# Allegro board pc049a_lemo_db_03.brd
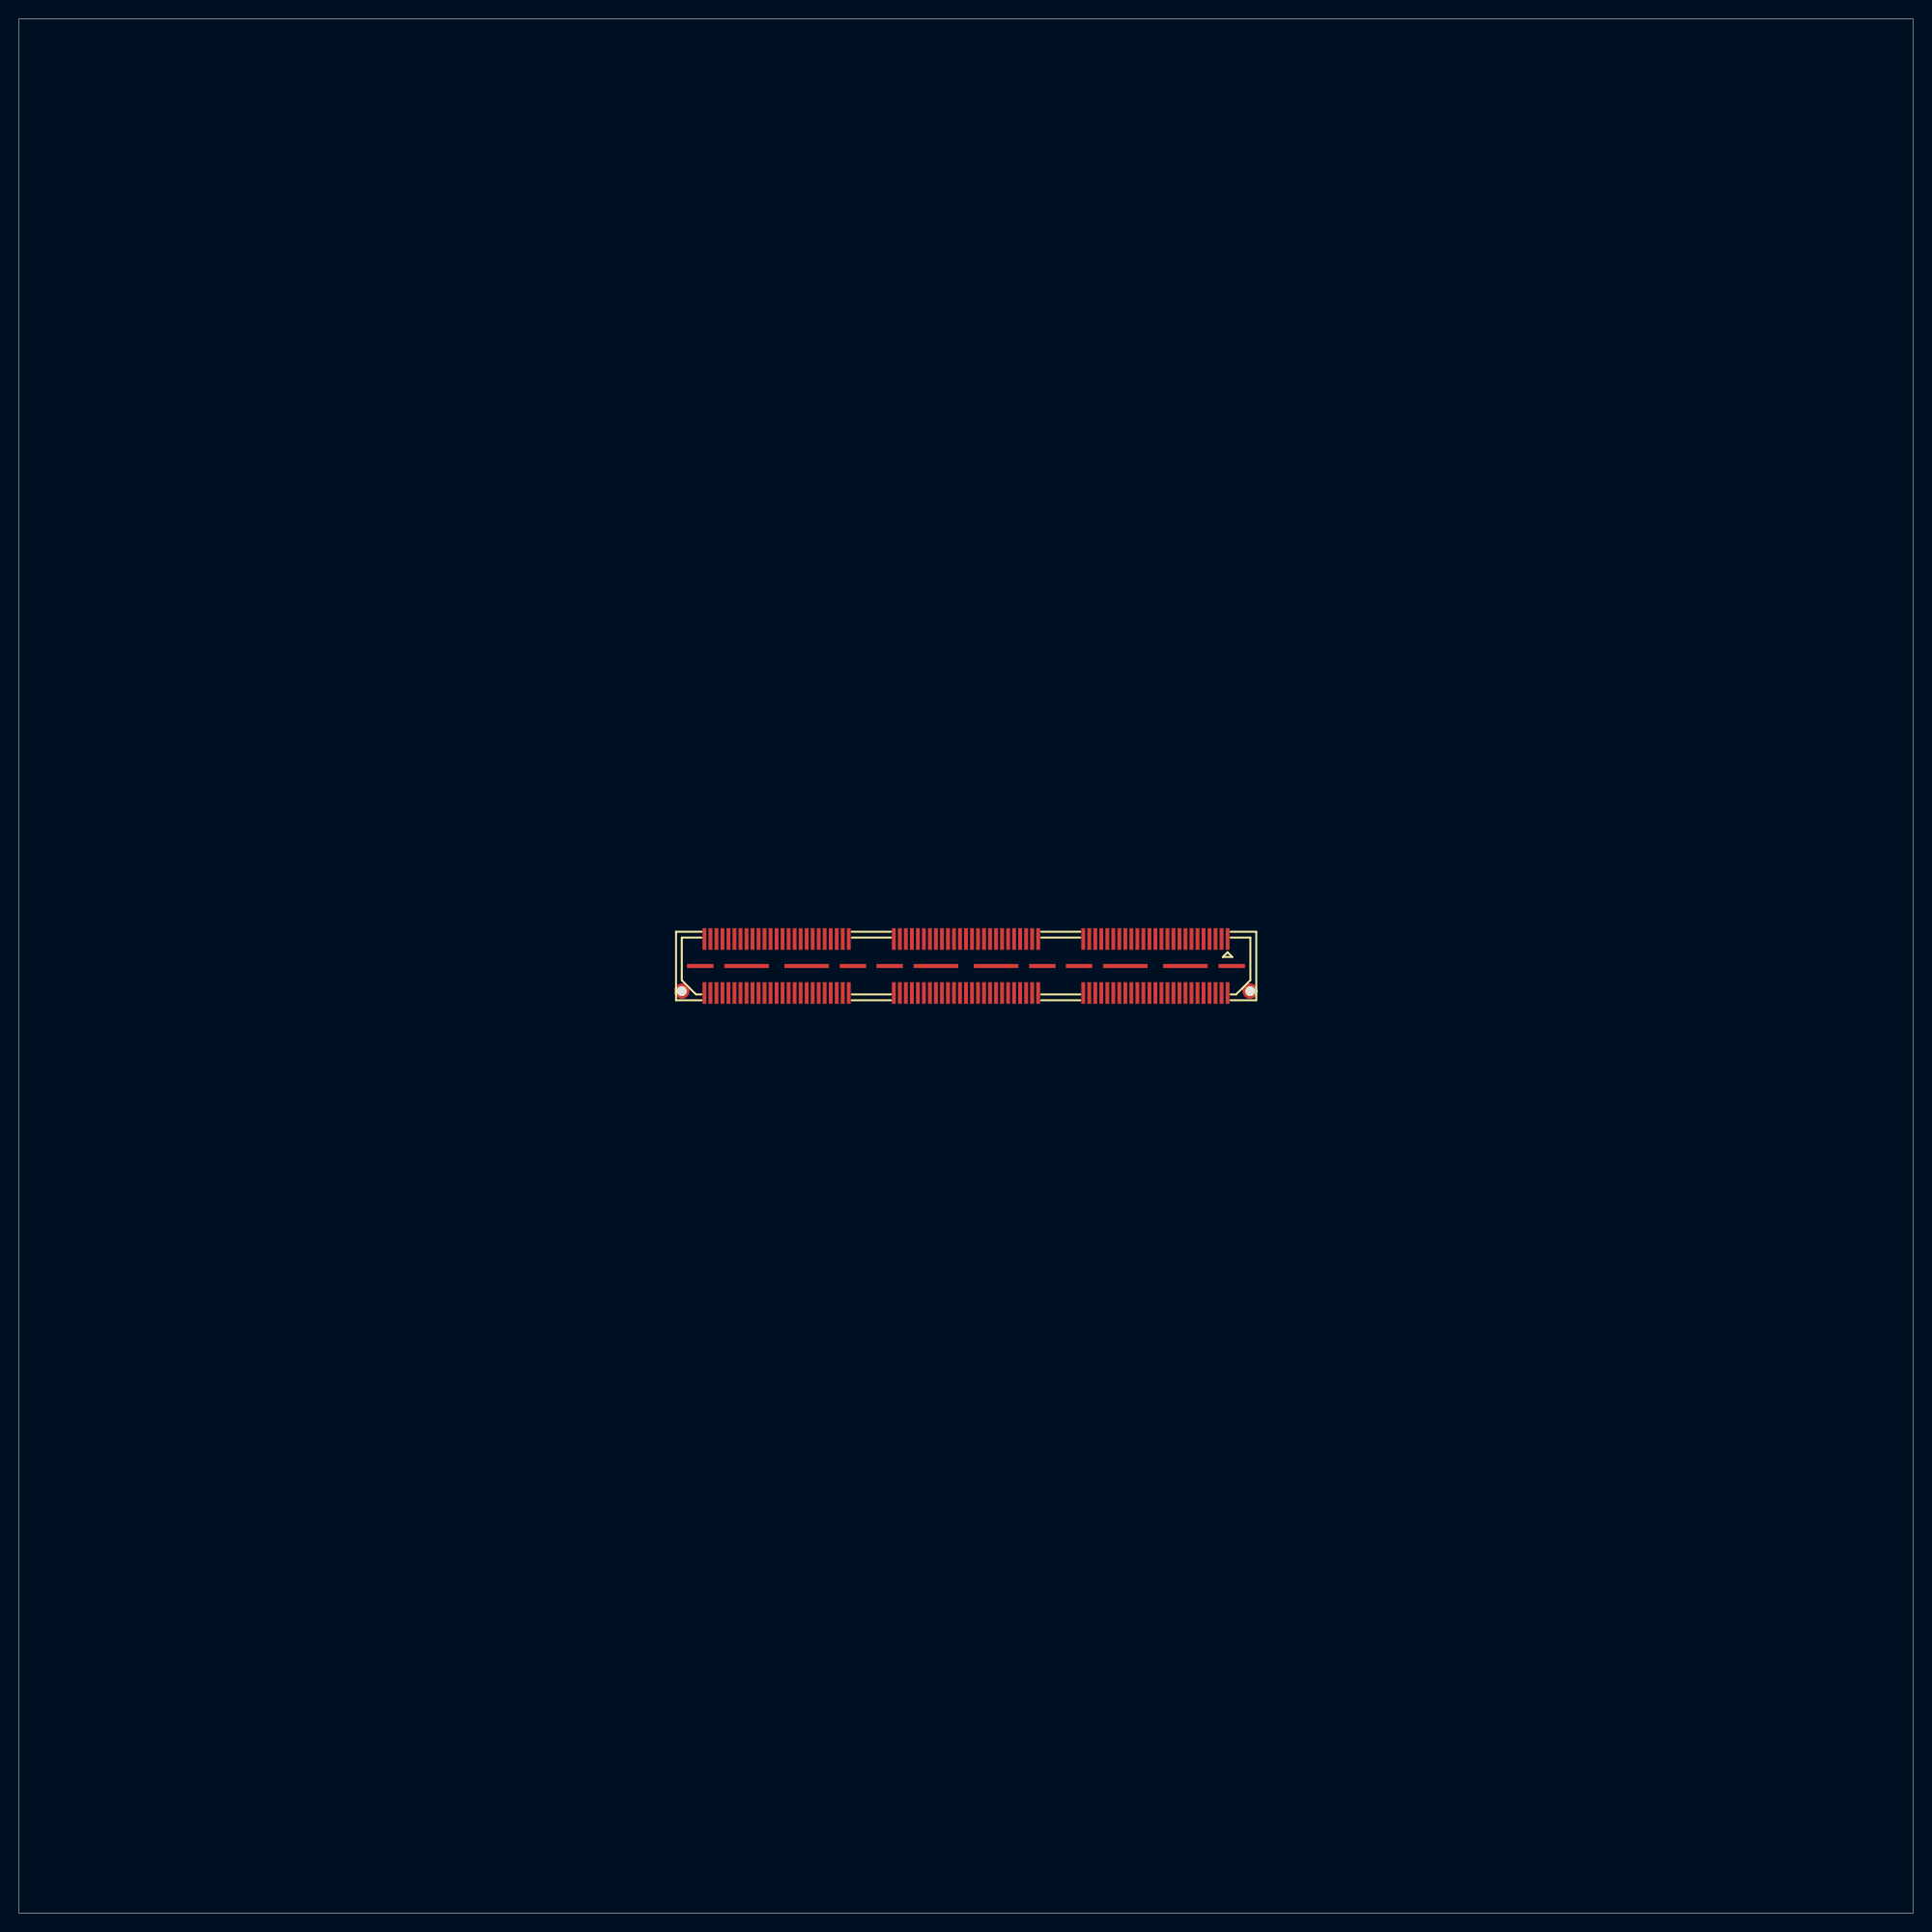
[diagram p0: board, top side]
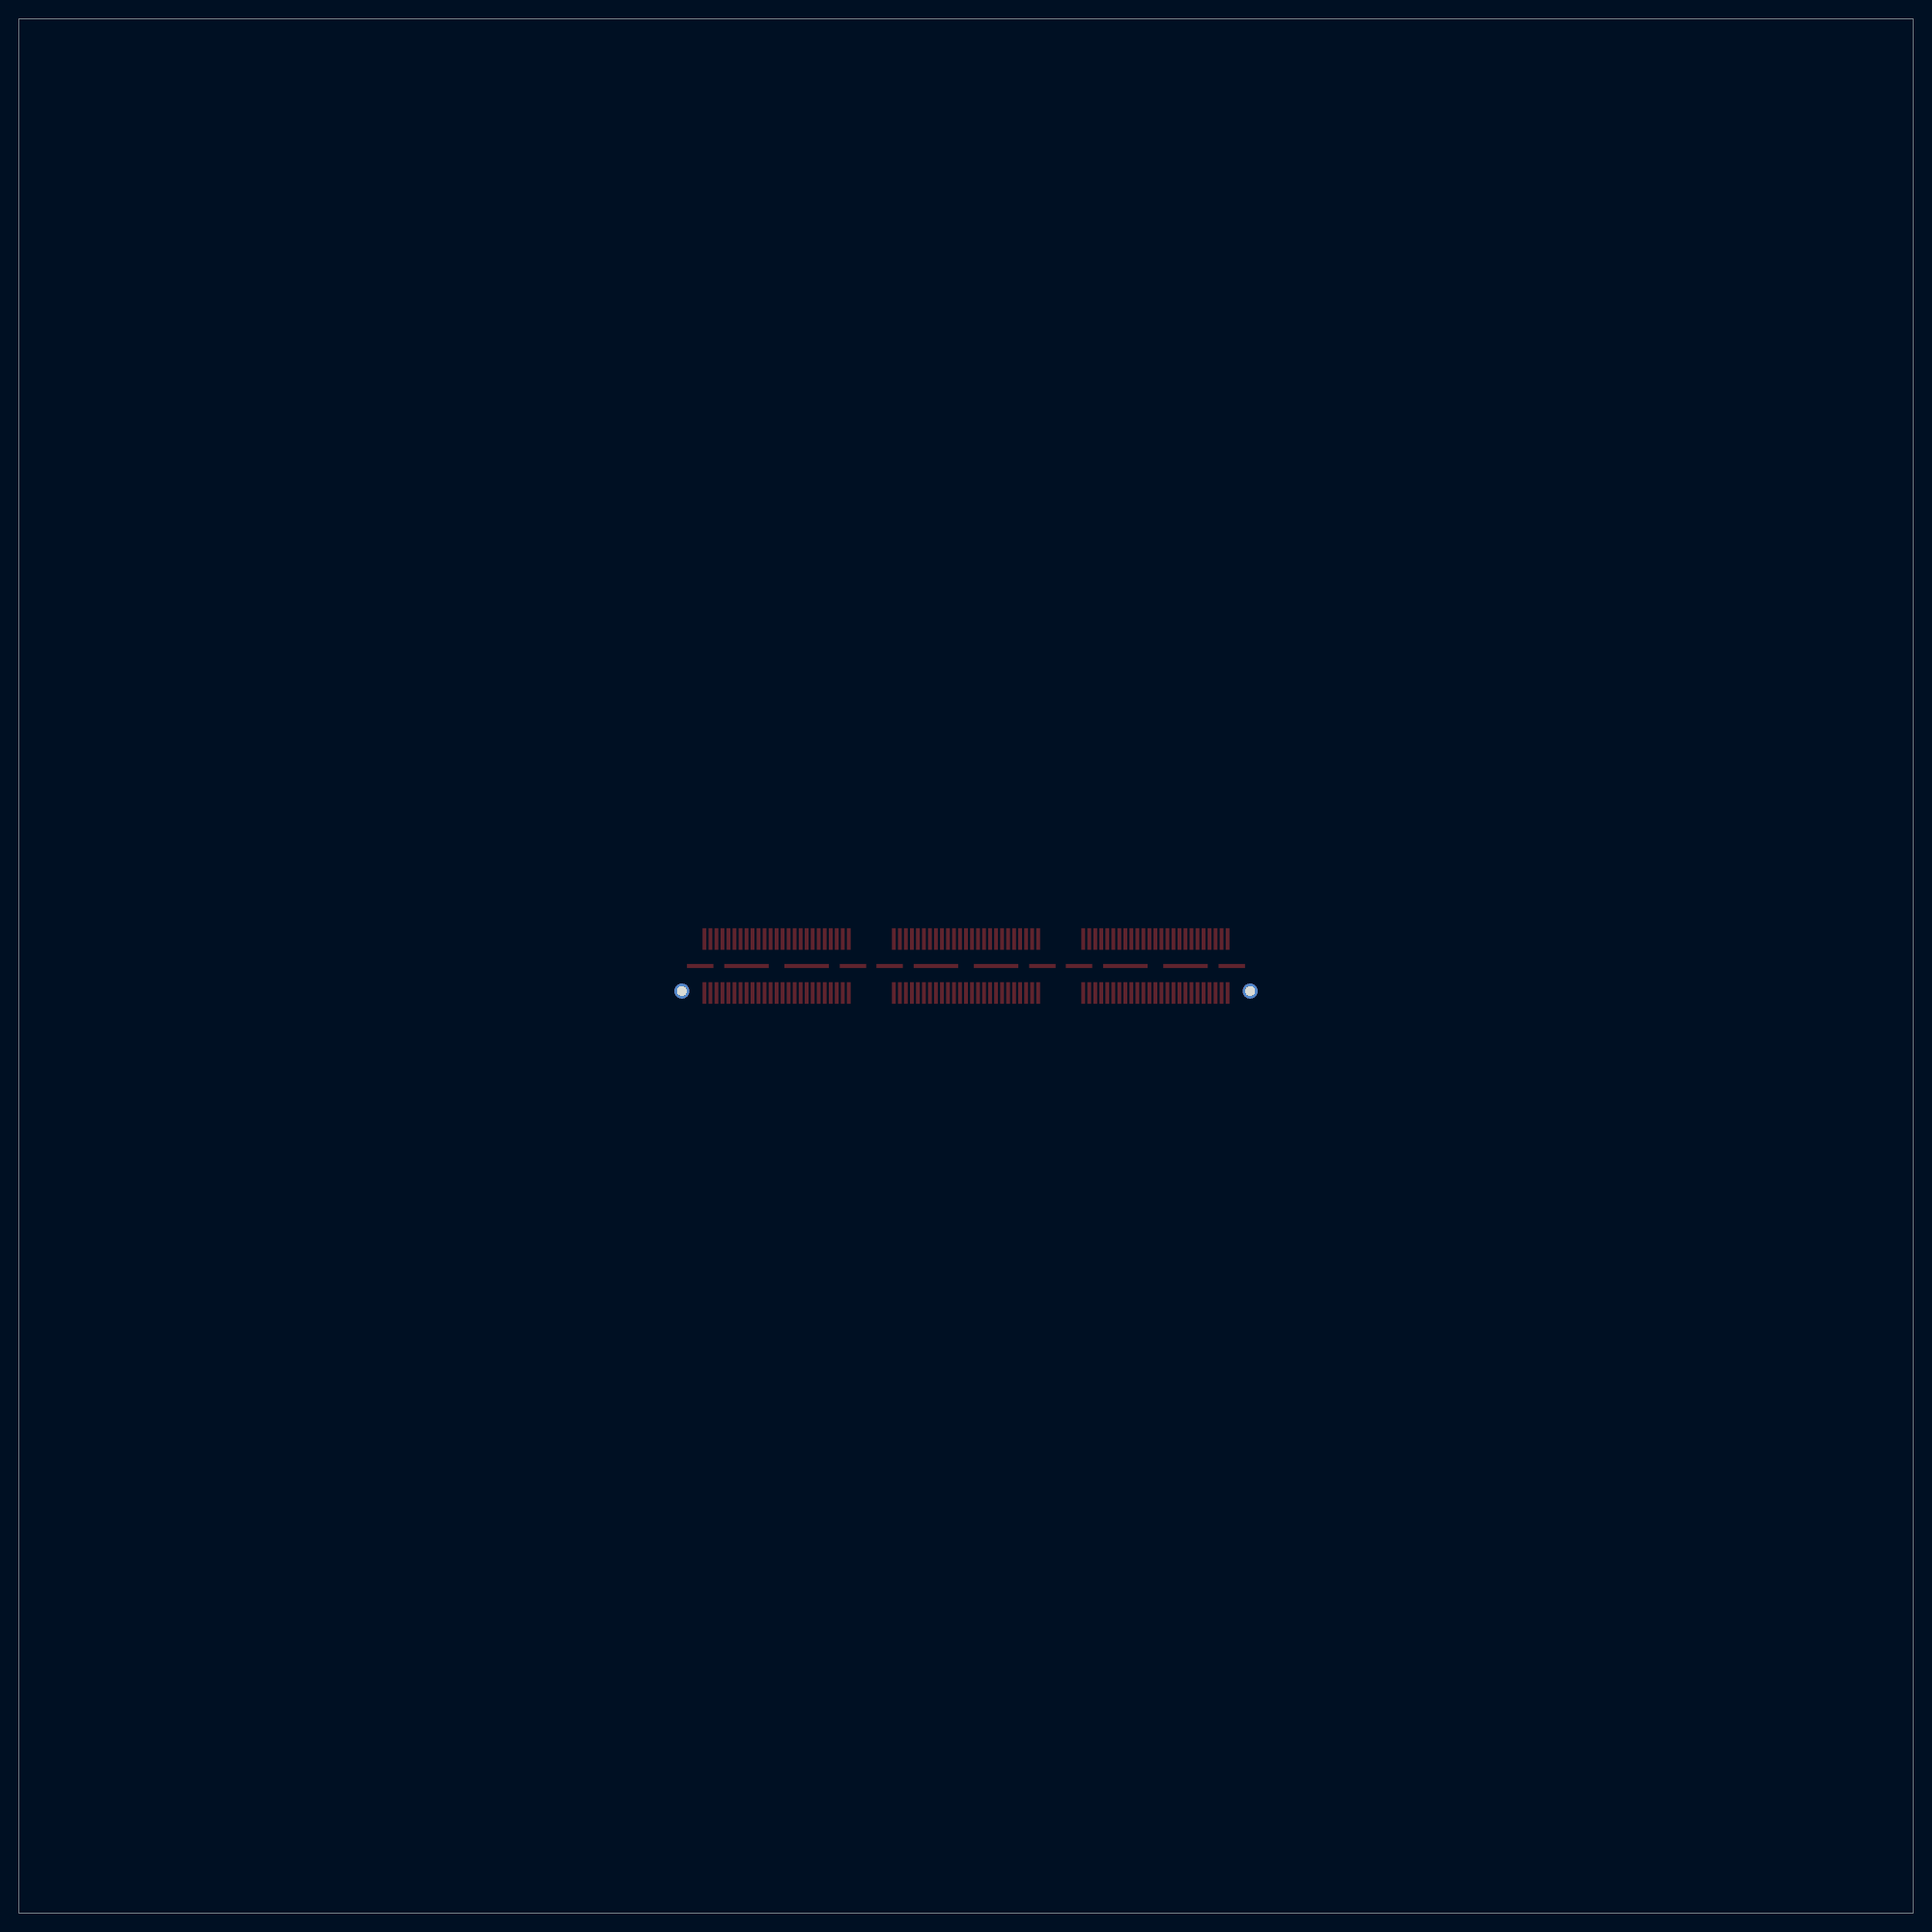
[diagram p1: board, bottom side, seen from below]

Outline 200 x 200 mm; copper layers: TOP, L2, L3, L4, L5, BOTTOM. Coordinates in mm from the lower left corner of the outline.
Outline path: 0,200 200,200 200,0 0,0 0,200

## Design rules (mm)
net group ANALOG_TO_MAROC: nets ANALOG_TO_MAROC<0> ANALOG_TO_MAROC<1> ANALOG_TO_MAROC<2> ANALOG_TO_MAROC<3> ANALOG_TO_MAROC<4> ANALOG_TO_MAROC<5> ANALOG_TO_MAROC<6> ANALOG_TO_MAROC<7> ANALOG_TO_MAROC<8> ANALOG_TO_MAROC<9> ANALOG_TO_MAROC<10> ANALOG_TO_MAROC<11> ANALOG_TO_MAROC<12> ANALOG_TO_MAROC<13> ANALOG_TO_MAROC<14> ANALOG_TO_MAROC<15> ANALOG_TO_MAROC<16> ANALOG_TO_MAROC<17> ANALOG_TO_MAROC<18> ANALOG_TO_MAROC<19> ANALOG_TO_MAROC<20> ANALOG_TO_MAROC<21> ANALOG_TO_MAROC<22> ANALOG_TO_MAROC<23> ANALOG_TO_MAROC<24> ANALOG_TO_MAROC<25> ANALOG_TO_MAROC<26> ANALOG_TO_MAROC<27> ANALOG_TO_MAROC<28> ANALOG_TO_MAROC<29> ANALOG_TO_MAROC<30> ANALOG_TO_MAROC<31> ANALOG_TO_MAROC<32> ANALOG_TO_MAROC<33> ANALOG_TO_MAROC<34> ANALOG_TO_MAROC<35> ANALOG_TO_MAROC<36> ANALOG_TO_MAROC<37> ANALOG_TO_MAROC<38> ANALOG_TO_MAROC<39> ANALOG_TO_MAROC<40> ANALOG_TO_MAROC<41> ANALOG_TO_MAROC<42> ANALOG_TO_MAROC<43> ANALOG_TO_MAROC<44> ANALOG_TO_MAROC<45> ANALOG_TO_MAROC<46> ANALOG_TO_MAROC<47> ANALOG_TO_MAROC<48> ANALOG_TO_MAROC<49> ANALOG_TO_MAROC<50> ANALOG_TO_MAROC<51> ANALOG_TO_MAROC<52> ANALOG_TO_MAROC<53> ANALOG_TO_MAROC<54> ANALOG_TO_MAROC<55> ANALOG_TO_MAROC<56> ANALOG_TO_MAROC<57> ANALOG_TO_MAROC<58> ANALOG_TO_MAROC<59> ANALOG_TO_MAROC<60> ANALOG_TO_MAROC<61> ANALOG_TO_MAROC<62> ANALOG_TO_MAROC<63>

## Placement (name value [footprint] x y rotation side)
J1  -  [CON150_QSSDA]  127.62 102.85 270 top

## Library data of the parts
J1 = CON150P: part number: CON150P-QSS75_01FDA

## Footprints (pads in the part's own frame, mm; a bottom-side part is the same pattern mirrored in y, then rotated)
CON150_QSSDA
  round 1.6 hole 1.016: (5.5,2.38) (5.5,-57.62)
  rect 2.286x0.406 smd: 1(0,0) 2(5.7,0) 3(0,-0.635) 4(5.7,-0.635) 5(0,-1.27) 6(5.7,-1.27) 7(0,-1.905) 8(5.7,-1.905) 9(0,-2.54) 10(5.7,-2.54) 11(0,-3.175) 12(5.7,-3.175) 13(0,-3.81) 14(5.7,-3.81) 15(0,-4.445) 16(5.7,-4.445) 17(0,-5.08) 18(5.7,-5.08) 19(0,-5.715) 20(5.7,-5.715) 21(0,-6.35) 22(5.7,-6.35) 23(0,-6.985) 24(5.7,-6.985) 25(0,-7.62) 26(5.7,-7.62) 27(0,-8.255) 28(5.7,-8.255) 29(0,-8.89) 30(5.7,-8.89) 31(0,-9.525) 32(5.7,-9.525) 33(0,-10.16) 34(5.7,-10.16) 35(0,-10.795) 36(5.7,-10.795) 37(0,-11.43) 38(5.7,-11.43) 39(0,-12.065) 40(5.7,-12.065) 41(0,-12.7) 42(5.7,-12.7) 43(0,-13.335) 44(5.7,-13.335) 45(0,-13.97) 46(5.7,-13.97) 47(0,-14.605) 48(5.7,-14.605) 49(0,-15.24) 50(5.7,-15.24) 51(0,-20) 52(5.7,-20) 53(0,-20.635) 54(5.7,-20.635) 55(0,-21.27) 56(5.7,-21.27) 57(0,-21.905) 58(5.7,-21.905) 59(0,-22.54) 60(5.7,-22.54) 61(0,-23.175) 62(5.7,-23.175) 63(0,-23.81) 64(5.7,-23.81) 65(0,-24.445) 66(5.7,-24.445) 67(0,-25.08) 68(5.7,-25.08) 69(0,-25.715) 70(5.7,-25.715) 71(0,-26.35) 72(5.7,-26.35) 73(0,-26.985) 74(5.7,-26.985) 75(0,-27.62) 76(5.7,-27.62) 77(0,-28.255) 78(5.7,-28.255) 79(0,-28.89) 80(5.7,-28.89) 81(0,-29.525) 82(5.7,-29.525) 83(0,-30.16) 84(5.7,-30.16) 85(0,-30.795) 86(5.7,-30.795) 87(0,-31.43) 88(5.7,-31.43) 89(0,-32.065) 90(5.7,-32.065) 91(0,-32.7) 92(5.7,-32.7) 93(0,-33.335) 94(5.7,-33.335) 95(0,-33.97) 96(5.7,-33.97) 97(0,-34.605) 98(5.7,-34.605) 99(0,-35.24) 100(5.7,-35.24) 101(0,-40) 102(5.7,-40) 103(0,-40.635) 104(5.7,-40.635) 105(0,-41.27) 106(5.7,-41.27) 107(0,-41.905) 108(5.7,-41.905) 109(0,-42.54) 110(5.7,-42.54) 111(0,-43.175) 112(5.7,-43.175) 113(0,-43.81) 114(5.7,-43.81) 115(0,-44.445) 116(5.7,-44.445) 117(0,-45.08) 118(5.7,-45.08) 119(0,-45.715) 120(5.7,-45.715) 121(0,-46.35) 122(5.7,-46.35) 123(0,-46.985) 124(5.7,-46.985) 125(0,-47.62) 126(5.7,-47.62) 127(0,-48.255) 128(5.7,-48.255) 129(0,-48.89) 130(5.7,-48.89) 131(0,-49.525) 132(5.7,-49.525) 133(0,-50.16) 134(5.7,-50.16) 135(0,-50.795) 136(5.7,-50.795) 137(0,-51.43) 138(5.7,-51.43) 139(0,-52.065) 140(5.7,-52.065) 141(0,-52.7) 142(5.7,-52.7) 143(0,-53.335) 144(5.7,-53.335) 145(0,-53.97) 146(5.7,-53.97) 147(0,-54.605) 148(5.7,-54.605) 149(0,-55.24) 150(5.7,-55.24)
  rect 0.432x2.794 smd: 151(2.85,0.445) 154(2.85,-15.685) 155(2.85,-19.555) 158(2.85,-35.685) 159(2.85,-39.555) 162(2.85,-55.685)
  rect 0.432x4.699 smd: 152(2.85,-4.445) 153(2.85,-10.795) 156(2.85,-24.445) 157(2.85,-30.795) 160(2.85,-44.445) 161(2.85,-50.795)

## Nets
AVDD: J1.147(A<146>) J1.148(A<147>) J1.149(A<148>) J1.150(A<149>)
GND_SIGNAL: J1.1(A<0>) J1.4(A<3>) J1.5(A<4>) J1.8(A<7>) J1.9(A<8>) J1.12(A<11>) J1.13(A<12>) J1.16(A<15>) J1.17(A<16>) J1.20(A<19>) J1.21(A<20>) J1.24(A<23>) J1.25(A<24>) J1.28(A<27>) J1.29(A<28>) J1.32(A<31>) J1.33(A<32>) J1.36(A<35>) J1.37(A<36>) J1.40(A<39>) J1.41(A<40>) J1.44(A<43>) J1.45(A<44>) J1.48(A<47>) J1.49(A<48>) J1.52(A<51>) J1.53(A<52>) J1.56(A<55>) J1.57(A<56>) J1.60(A<59>) J1.61(A<60>) J1.64(A<63>) J1.65(A<64>) J1.68(A<67>) J1.69(A<68>) J1.72(A<71>) J1.73(A<72>) J1.76(A<75>) J1.77(A<76>) J1.80(A<79>) J1.81(A<80>) J1.84(A<83>) J1.85(A<84>) J1.88(A<87>) J1.89(A<88>) J1.92(A<91>) J1.93(A<92>) J1.96(A<95>) J1.97(A<96>) J1.100(A<99>) J1.101(A<100>) J1.104(A<103>) J1.105(A<104>) J1.108(A<107>) J1.109(A<108>) J1.112(A<111>) J1.113(A<112>) J1.116(A<115>) J1.117(A<116>) J1.120(A<119>) J1.121(A<120>) J1.124(A<123>) J1.125(A<124>) J1.128(A<127>) J1.129(A<128>) J1.132(A<131>) J1.133(A<132>) J1.136(A<135>) J1.137(A<136>) J1.140(A<139>) J1.141(A<140>) J1.144(A<143>) J1.145(A<144>) J1.146(A<145>)
ANALOG_TO_MAROC<0>: J1.2(A<1>)
ANALOG_TO_MAROC<1>: J1.3(A<2>)
ANALOG_TO_MAROC<2>: J1.6(A<5>)
ANALOG_TO_MAROC<3>: J1.7(A<6>)
ANALOG_TO_MAROC<4>: J1.10(A<9>)
ANALOG_TO_MAROC<5>: J1.11(A<10>)
ANALOG_TO_MAROC<6>: J1.14(A<13>)
ANALOG_TO_MAROC<7>: J1.15(A<14>)
ANALOG_TO_MAROC<8>: J1.18(A<17>)
ANALOG_TO_MAROC<9>: J1.19(A<18>)
ANALOG_TO_MAROC<10>: J1.22(A<21>)
ANALOG_TO_MAROC<11>: J1.23(A<22>)
ANALOG_TO_MAROC<12>: J1.26(A<25>)
ANALOG_TO_MAROC<13>: J1.27(A<26>)
ANALOG_TO_MAROC<14>: J1.30(A<29>)
ANALOG_TO_MAROC<15>: J1.31(A<30>)
ANALOG_TO_MAROC<16>: J1.34(A<33>)
ANALOG_TO_MAROC<17>: J1.35(A<34>)
ANALOG_TO_MAROC<18>: J1.38(A<37>)
ANALOG_TO_MAROC<19>: J1.39(A<38>)
ANALOG_TO_MAROC<20>: J1.42(A<41>)
ANALOG_TO_MAROC<21>: J1.43(A<42>)
ANALOG_TO_MAROC<22>: J1.46(A<45>)
ANALOG_TO_MAROC<23>: J1.47(A<46>)
ANALOG_TO_MAROC<24>: J1.50(A<49>)
ANALOG_TO_MAROC<25>: J1.51(A<50>)
ANALOG_TO_MAROC<26>: J1.54(A<53>)
ANALOG_TO_MAROC<27>: J1.55(A<54>)
ANALOG_TO_MAROC<28>: J1.58(A<57>)
ANALOG_TO_MAROC<29>: J1.59(A<58>)
ANALOG_TO_MAROC<30>: J1.62(A<61>)
ANALOG_TO_MAROC<31>: J1.63(A<62>)
ANALOG_TO_MAROC<32>: J1.66(A<65>)
ANALOG_TO_MAROC<33>: J1.67(A<66>)
ANALOG_TO_MAROC<34>: J1.70(A<69>)
ANALOG_TO_MAROC<35>: J1.71(A<70>)
ANALOG_TO_MAROC<36>: J1.74(A<73>)
ANALOG_TO_MAROC<37>: J1.75(A<74>)
ANALOG_TO_MAROC<38>: J1.78(A<77>)
ANALOG_TO_MAROC<39>: J1.79(A<78>)
ANALOG_TO_MAROC<40>: J1.82(A<81>)
ANALOG_TO_MAROC<41>: J1.83(A<82>)
ANALOG_TO_MAROC<42>: J1.86(A<85>)
ANALOG_TO_MAROC<43>: J1.87(A<86>)
ANALOG_TO_MAROC<44>: J1.90(A<89>)
ANALOG_TO_MAROC<45>: J1.91(A<90>)
ANALOG_TO_MAROC<46>: J1.94(A<93>)
ANALOG_TO_MAROC<47>: J1.95(A<94>)
ANALOG_TO_MAROC<48>: J1.98(A<97>)
ANALOG_TO_MAROC<49>: J1.99(A<98>)
ANALOG_TO_MAROC<50>: J1.102(A<101>)
ANALOG_TO_MAROC<51>: J1.103(A<102>)
ANALOG_TO_MAROC<52>: J1.106(A<105>)
ANALOG_TO_MAROC<53>: J1.107(A<106>)
ANALOG_TO_MAROC<54>: J1.110(A<109>)
ANALOG_TO_MAROC<55>: J1.111(A<110>)
ANALOG_TO_MAROC<56>: J1.114(A<113>)
ANALOG_TO_MAROC<57>: J1.115(A<114>)
ANALOG_TO_MAROC<58>: J1.118(A<117>)
ANALOG_TO_MAROC<59>: J1.119(A<118>)
ANALOG_TO_MAROC<60>: J1.122(A<121>)
ANALOG_TO_MAROC<61>: J1.123(A<122>)
ANALOG_TO_MAROC<62>: J1.126(A<125>)
ANALOG_TO_MAROC<63>: J1.127(A<126>)
DBOARD_MISO: J1.131(A<130>)
DBOARD_MISO*: J1.135(A<134>)
DBOARD_MOSI: J1.138(A<137>)
DBOARD_MOSI*: J1.142(A<141>)
DBOARD_SCLK: J1.130(A<129>)
DBOARD_SCLK*: J1.134(A<133>)
DBOARD_SSN: J1.139(A<138>)
DBOARD_SSN*: J1.143(A<142>)
P1: J1.151 J1.152 J1.153 J1.154
P2: J1.155 J1.156 J1.157 J1.158
P3: J1.159 J1.160 J1.161 J1.162
